# Altium PCB PCB1.PcbDoc
Units mil, origin at the board's own origin, x right, y up, seen from the top; angles counter-clockwise.
Board outline 3950 x 2945 mil, 2 copper layers (Top Layer, Bottom Layer); 16 components, 14 nets, 95 pads, 0 vias.
Unrouted connection lines stored in the file: 2.
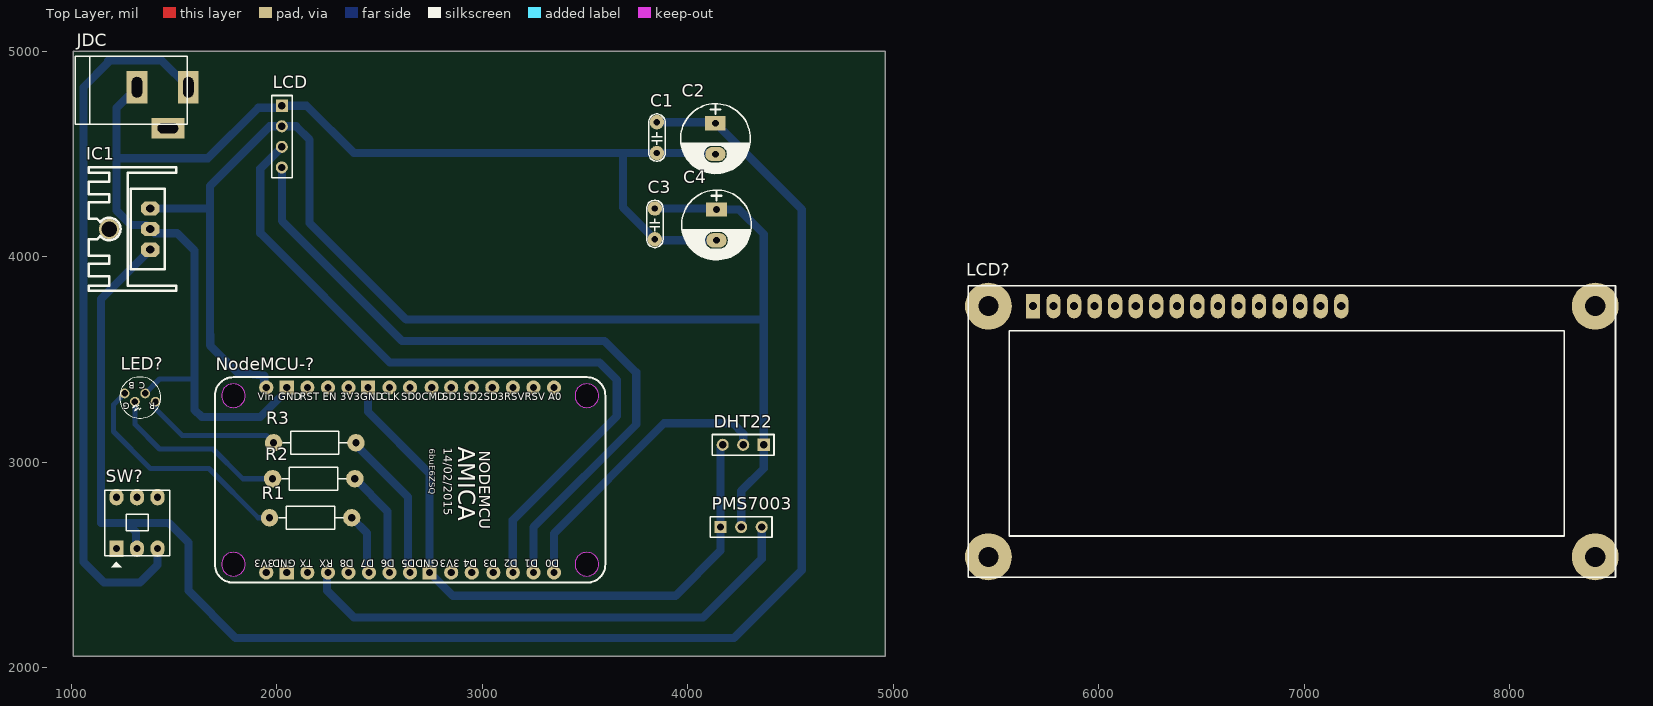
[diagram p0: Top Layer view]
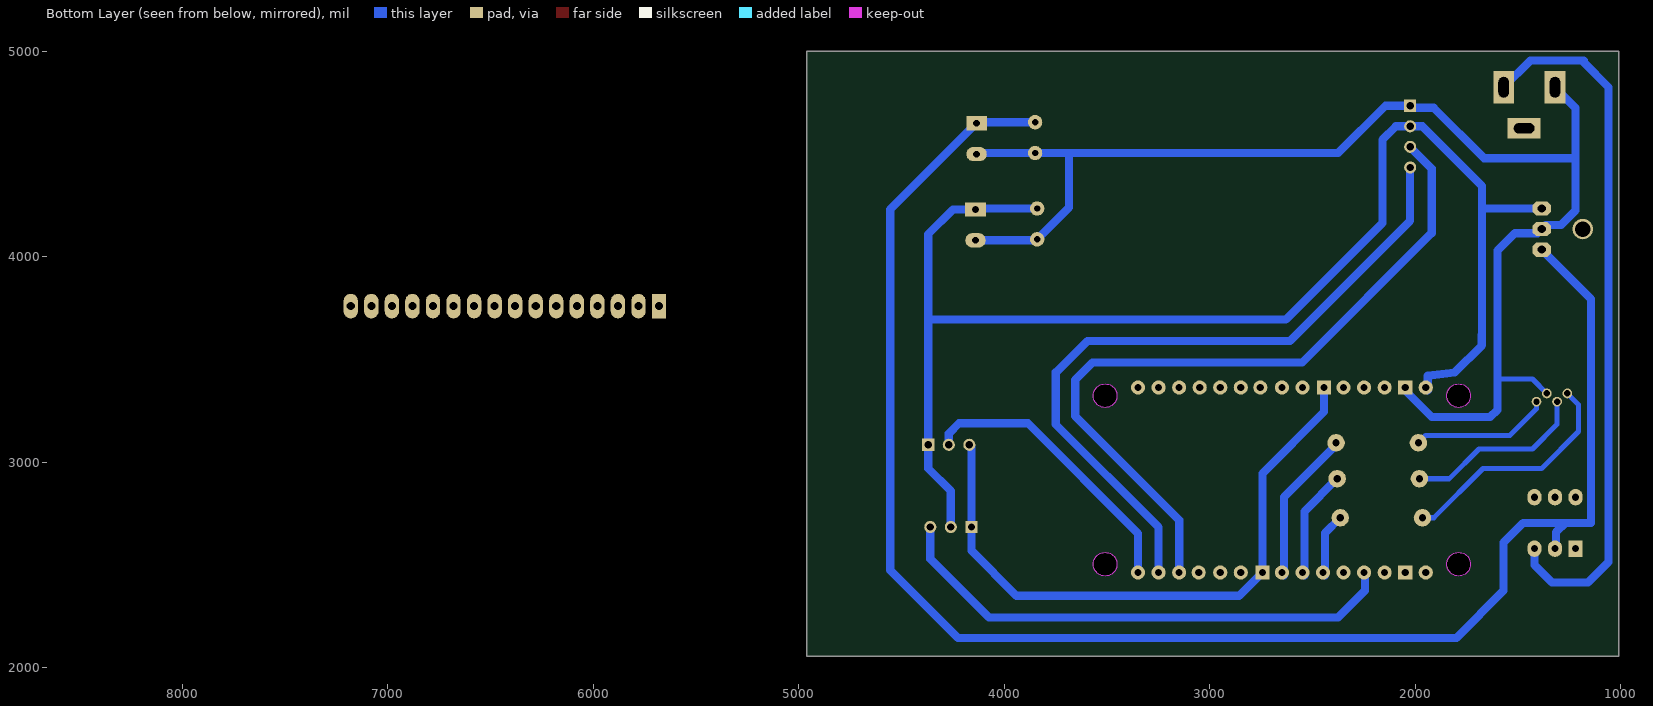
[diagram p1: Bottom Layer view, seen from below]
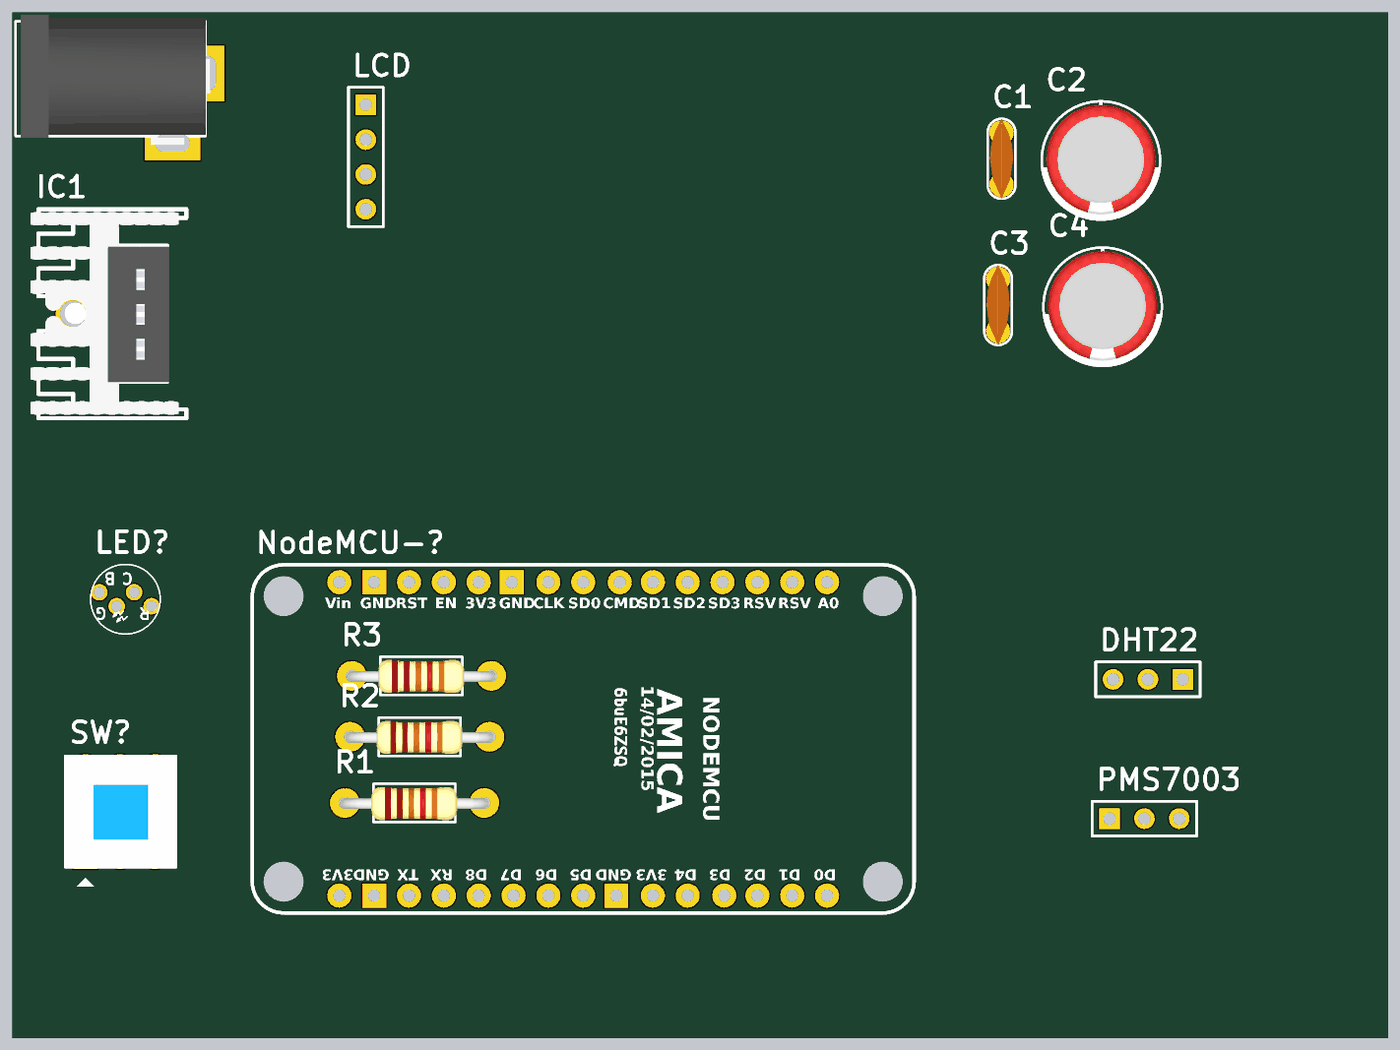
[diagram p2: 3D render of the assembled board from above, using the file's embedded part models]

## Layer stack, top to bottom
Top Solder: solder mask 0.4, Solder Resist, Dk 3.5
Top Layer: signal copper 1.4
Dielectric 1: dielectric 12.6, FR-4, Dk 4.8
Bottom Layer: signal copper 1.4
Bottom Solder: solder mask 0.4, Solder Resist, Dk 3.5

## Board outline
1010,5000 4955,5000 4960,5000 4960,2055 1010,2055 1010,5000

## Design rules (kind name [scope] priority, off if disabled: settings)
Clearance [All] p1: gap=10
PolygonConnect [All] p1: connectstyle=Relief reliefconductorwidth=10 reliefentries=4 polygonreliefangle="90 Angle" airgapwidth=10
RoomDefinition Sheet1 [InComponentClass('Sheet1')] p1: confinementstyle=ConfineIn formatcopy=TRUE lockcomponents=FALSE outline 7045,1065 12895,1065 12895,4345 7045,4345
RoutingVias [All] p1: holewidth=28 width=50 viastyle="Through Hole" minholewidth=28 minwidth=50 maxholewidth=28 maxwidth=50
SolderMaskExpansion [All] p1: expansion=4
Width [All] p1: maxlimit=55 minlimit=25 preferedwidth=40
30 further rules are at their usual default settings.

## Components (designator, comment, footprint, x,y, rotation, side; value= is the part's Value field where it differs from the comment)
C1 "104" CN1.5 3850,4505 r90 top
C2 "100uF/35V" CP1.5/3.4 4135,4650 r270 top
C3 "104" CN1.5 3840,4085 r90 top
C4 "100uF/35V" CP1.5/3.4 4140,4230 r270 top
DHT22 "Header 3" HDR1X3 4370,3085 r180 top
IC1 "LM7805" QTO-220H3 1385,4035 r90 top
JDC "Jac DC" DC-IN 1445,4725 r0 top
LCD "jump cái" HDR1X4 2025,4735 r270 top
LCD? "LCD16x2A" LCD16X2 5680,3760 r0 top
LED? "LED-RGB" LED-5MMRGBCA 1385,3315 r180 top
NodeMCU-? "NodeMCU V1.0 ESP-12E" "NodeMCU V1.0 ESP-12E" 3595,3415 r270 top
PMS7003 "Header 3" HDR1X3 4160,2685 r0 top
R1 "330" R1/2W 2365,2730 r180 top
R2 "330" R1/2W 2380,2920 r180 top
R3 "330" R1/2W 2385,3095 r180 top
SW? "SW6S" SW6 1220,2580 r90 top

## Footprints (in the part's own frame and the unit in brackets; to place one, negate y for a bottom-side part, rotate by r counter-clockwise, add the part's x,y. Pads: shape width x height; smd on the part's side, far side on the other; paste and mask are expansions set on the pad)
CN1.5 [mil]
  round 70 hole 31: 1(0,0) 2(150,0)
  silkscreen extent -40,-40 190,40, body extent -40,-33 190,33, height 235
CP1.5/3.4 [mil] "Tu hoa 220->470uF,16V, 470uF/16V,25V"
  rect 70x100 hole 32: 1(0,0)
  oval 70x100 hole 32: 2(150,0)
  silkscreen extent -95,-170 245,170, body extent -85,-157 230,157, height 446
DC-IN [mil] "Jac DC input"
  rect 100x160 hole 50 slot 100 at 90 deg: 1(125,100) 2(-125,100)
  rect 160x100 hole 50 slot 100 at 0 deg: 3(25,-100)
  silkscreen extent -425,-80 120,250, body extent -410,-105 134,269, height 434
HDR1X3 [mm] "Connector; Header; 3 Position"
  rect 1.5x1.5 hole 0.9: 1(0,0)
  round 1.5 hole 0.9: 2(2.54,0) 3(5.08,0)
  silkscreen extent -1.27,-1.27 6.35,1.27, body extent -1.27,-1.27 6.35,1.27, height 7
HDR1X4 [mm] "Connector; Header; 4 Position"
  rect 1.5x1.5 hole 0.9: 1(0,0)
  round 1.5 hole 0.9: 2(2.54,0) 3(5.08,0) 4(7.62,0)
  silkscreen extent -1.27,-1.27 8.89,1.27, body extent -1.27,-1.27 8.89,1.27, height 7
LCD16X2 [mm] "LCD dipslay 16x2, 16 pin"
  rect 1.778x3.048 hole 1: 1(0,0)
  oval 1.778x3.048 hole 1: 2(2.54,0) 3(5.08,0) 4(7.62,0) 5(10.16,0) 6(12.7,0) 7(15.24,0) 8(17.78,0) 9(20.32,0) 10(22.86,0) 11(25.4,0) 12(27.94,0) 13(30.48,0) 14(33.02,0) 15(35.56,0) 16(38.1,0)
  round 5.8 / inner round 0 / far side round 0 hole 2.5 unplated: M1(-5.5,0) M2(69.5,0) M3(-5.5,-31) M4(69.5,-31)
  silkscreen extent -8,-33.5 72,2.5, body extent -8.13,-34.47 72.37,2.03, height 18.14
LED-5MMRGBCA [mm]
  round 1.2 hole 0.8: A(0.635,-0.508) B(1.905,0.508) G(-0.635,0.508) R(3.175,-0.508)
  silkscreen extent -1.27,-2.54 3.81,2.54, body extent -1.4,-2.67 3.91,2.66, height 9.4
"NodeMCU V1.0 ESP-12E" [mil]
  round 115 hole 115 unplated paste-300 mask-300: 0(91,-86) 0(91,-1806) 0(911,-86) 0(911,-1806)
  round 69 hole 35: 3V3(51,-1246) 3V3(951,-746) 3V3(951,-1646) A0(51,-246) CLK(51,-1046) CMD(51,-841) D0(951,-246) D1(951,-346) D2(951,-446) D3(951,-541) D4(951,-646) D5(951,-946) D6(951,-1046) D7(951,-1146) D8(951,-1246) EN(51,-1346) RST(51,-1446) RSV(51,-346) RSV(51,-446) RX(951,-1346) SD0(51,-946) SD1(51,-746) SD2(51,-646) SD3(51,-546) TX(951,-1446) VIN(51,-1646)
  rect 69x69 hole 35: GND(51,-1151) GND(51,-1546) GND(951,-851) GND(951,-1546)
  Keep-Out Layer circle w2: c911,-1806 r57.5
  Keep-Out Layer circle w2: c91,-1806 r57.5
  Keep-Out Layer circle w2: c911,-86 r57.5
  Keep-Out Layer circle w2: c91,-86 r57.5
  silkscreen extent 1,-1896 1001,4
QTO-220H3 [mil] "TO-220 1-2-3"
  oct 70x90 hole 40: 1(0,0) 2(100,0) 3(200,0)
  round 100 hole 75: ""(100,200)
  silkscreen extent -200,-125 400,300, body extent -190,-102 392,323, height 984
R1/2W [mil] "R 1/2W, 2 pin, 300mil"
  round 85 hole 35: 1(0,0) 2(400,0)
  silkscreen extent 42,-55 356,55, body extent -12,-45 414,49, height 91
SW6 [mil] "SW DTDP - 6Pin 260x300x300 mil"
  rect 80x70 hole 35: 1(0,0)
  oval 80x70 hole 35: 2(0,-100) 3(0,-200) 4(250,-200) 5(250,-100) 6(250,0)
  silkscreen extent -90,-260 285,58, body extent -33,-259 281,55, height 532

## Part data
C1 C3: library part CN1.5, "Cap np 682pF => 104pF"
C2 C4: library part CP3, "Cap 100uF/35V - 470uF/16V"
DHT22 PMS7003: "Header, 3-Pin"
IC1: library part LM78xx, "On ap +, from + 5 to + 24VDC"
JDC: library part DCIN, "Jac DC input"
LCD: library part "Header 4", "Header, 4-Pin"
LCD?: library part LCD16x2, "LCD dipslay 16 char, 2 line"
NodeMCU-?: "NodeMCU V1.0 ESP8266 (ESP-12E)"
R1 R2 R3: library part R1/4W, "Resistor 1/4W"
SW?: "SW-DTDP - 6 Pin"

## Nets (pads, with @x,y where several pads share a name; then routed paths per layer and width w, separated by ;. In a path a pad name is that pad's centre, name@x,y a point inside that pad or via, vN(x,y) a via of type N, cw(c..) or ccw(c..) an arc to the next point about the centre after c; other vN are vias at no path point)
5-9V: C1.2 C2.1 IC1.1 SW?.2 | length 8127.5
  Bottom Layer w40: SW?.2 1315,2585 1315,2660 1270,2705 ; IC1.1 1145,3795 1145,2705 1270,2705 ; C1.2 4130,4655 C2.1 4555,4230 4555,2475 4225,2145 1800,2145 1570,2375 1570,2610 1475,2705 1270,2705
5V: C3.2 C4.1 DHT22.1 IC1.3 LCD.2 NodeMCU-?.VIN PMS7003.2 | length 6954.9
  Bottom Layer w40: IC1.3 1670,4235 1675,4230 ; NodeMCU-?.VIN@1939,3349 1939,3421 1808,3437 1676,3569 1675,3685 1675,4230 ; C3.2 4135,4235 C4.1 4250,4230 4370,4110 4370,3700 ; PMS7003.2 4260,2860 4370,2970 DHT22.1 4370,3700 ; 1675,4230 1675,4345 1965,4635 LCD.2 2095,4635 2160,4570 2160,4165 2630,3695 4365,3695 4370,3700
B: LED?.B R2.2 | length 889.8
  Bottom Layer w25: LED?.B 1310,3185 1430,3065 1690,3065 1835,2920 R2.2
DHT: DHT22.2 NodeMCU-?.D0 | length 1408.7
  Bottom Layer w40: NodeMCU-?.D0 3349,2654 3885,3190 4220,3190 4270,3140 DHT22.2
G: LED?.G R3.2 | length 678.3
  Bottom Layer w25: LED?.G 1410,3260 1540,3130 1950,3130 R3.2
GND: C1.1 C2.2 C3.1 C4.2 DHT22.3 IC1.2 JDC.2 LCD.1 LED?.A NodeMCU-?.GND PMS7003.1 | length 9649.1
  Bottom Layer w25: LED?.A 1430,3405 1595,3405 1600,3410
  Bottom Layer w40: JDC.2 1220,4725 1220,4480 ; LCD.1@2015,4725 1910,4725 1665,4480 1220,4480 ; LCD.1 2145,4735 2375,4505 3685,4505 ; NodeMCU-?.GND@2039,3349 2039,3339 1919.74,3219.74 1635.26,3219.74 1600,3255 1600,3410 1600,4030 1515,4115 1405,4115 IC1.2 1365,4155 1290,4155 1220,4225 1220,4480 ; NodeMCU-?.GND@2444,3364 2444,3246 2744,2946 2744,2464 2858,2350 3940,2350 4160,2570 PMS7003.1 4160,3075 DHT22.3 ; C2.2 4130,4505 C1.1 3685,4505 ; C4.2 3845,4080 C3.1 3685,4240 3685,4505
NetNodeMCU-?_D5: NodeMCU-?.D5 R3.1 | length 751.2
  Bottom Layer w40: R3.1 2385,3085 2639,2831 NodeMCU-?.D5@2639,2449
NetNodeMCU-?_D6: NodeMCU-?.D6 R2.1 | length 536.9
  Bottom Layer w40: R2.1 2539,2761 NodeMCU-?.D6@2539,2449
NetNodeMCU-?_D7: NodeMCU-?.D7 R1.1 | length 311.7
  Bottom Layer w40: R1.1 2439,2656 NodeMCU-?.D7@2439,2449
PMS: NodeMCU-?.RX PMS7003.3 | length 2532.6
  Bottom Layer w40: NodeMCU-?.RX 2245,2460 2245,2375 2375,2245 4075,2245 4360,2530 PMS7003.3
R: LED?.R R1.2 | length 1141.8
  Bottom Layer w25: LED?.R 1205,3280 1205,3150 1385,2970 1670,2970 1910,2730 R1.2
SCL: LCD.4 NodeMCU-?.D1 | length 3473
  Bottom Layer w40: LCD.4 2025,4175 2610,3590 3595,3590 3745,3440 3750,3440 3750,3185 3249,2684 NodeMCU-?.D1
SDA: LCD.3 NodeMCU-?.D2 | length 3640.2
  Bottom Layer w40: LCD.3 1920,4430 1920,4115 2550,3485 3570,3485 3655,3400 3655,3225 3149,2719 NodeMCU-?.D2
VIN: JDC.1 SW?.3 | length 3450.2
  Bottom Layer w40: SW?.3 1420,2500 1335,2415 1160,2415 1060,2515 1060,4825 1180,4945 1180,4955 1440,4955 JDC.1
pads on no net: IC1. JDC.3 LCD?.1 LCD?.2 LCD?.3 LCD?.4 LCD?.5 LCD?.6 LCD?.7 LCD?.8 LCD?.9 LCD?.10 LCD?.11 LCD?.12 LCD?.13 LCD?.14 LCD?.15 LCD?.16 LCD?.M1 LCD?.M2 LCD?.M3 LCD?.M4 NodeMCU-?.0 NodeMCU-?.3V3 NodeMCU-?.A0 NodeMCU-?.CLK NodeMCU-?.CMD NodeMCU-?.D3 NodeMCU-?.D4 NodeMCU-?.D8 NodeMCU-?.EN NodeMCU-?.RST NodeMCU-?.RSV NodeMCU-?.SD0 NodeMCU-?.SD1 NodeMCU-?.SD2 NodeMCU-?.SD3 NodeMCU-?.TX SW?.1 SW?.4 SW?.5 SW?.6

## Text inside footprints (layer, text, board x,y; h text height)
LED?: Top Overlay "C" at 1360,3390 h31.5 r180; Top Overlay "G" at 1285,3290 h31.5 r180; Top Overlay "B" at 1310,3390 h31.5 r180; Top Overlay "R" at 1410,3290 h31.5 r180
NodeMCU-?: Top Overlay "14/02/2015" at 2797,3070 h69 r270; Top Overlay "AMICA" at 2856,3076 h140 r270; Top Overlay "NODEMCU" at 2966,3055 h90 r270; Top Overlay "6buE6ZSQ" at 2742,3066 h30 r270; Top Overlay "CLK" at 2505,3289 h60; Top Overlay "SD0" at 2605.43,3289 h60; Top Overlay "SD1" at 2806.29,3289 h60; Top Overlay "SD2" at 2906.71,3289 h60; Top Overlay "SD3" at 3007.14,3289 h60; Top Overlay "RSV" at 3107.57,3289 h60; Top Overlay "RSV" at 3208,3289 h60; Top Overlay "A0" at 3322,3289 h60; Top Overlay "D5" at 2674,2539 h60 r180; Top Overlay "GND" at 2788,2539 h60 r180; Top Overlay "3V3" at 2889.99,2539 h60 r180; Top Overlay "D4" at 2975,2539 h60 r180; Top Overlay "D3" at 3073.42,2539 h60 r180; Top Overlay "D2" at 3173.42,2539 h60 r180; Top Overlay "D1" at 3273.65,2539 h60 r180; Top Overlay "D0" at 3375,2539 h60 r180; Top Overlay "CMD" at 2705.86,3289 h60; Top Overlay "D6" at 2574.88,2539 h60 r180; Top Overlay "3V3" at 1989,2539 h60 r180; Top Overlay "GND" at 2092.8,2539 h60 r180; Top Overlay "TX" at 2176,2539 h60 r180; Top Overlay "RX" at 2274.94,2539 h60 r180; Top Overlay "D8" at 2373.89,2539 h60 r180; Top Overlay "D7" at 2473.77,2539 h60 r180; Top Overlay "Vin" at 1908,3289 h60; Top Overlay "GND" at 2008,3289 h60; Top Overlay "RST" at 2111,3289 h60; Top Overlay "EN" at 2223,3289 h60; Top Overlay "3V3" at 2310,3289 h60; Top Overlay "GND" at 2407,3289 h60